# Altium PCB PCB_light_panel.pcbdoc
Units mil, origin at the board's own origin, x right, y up, seen from the top; angles counter-clockwise.
Board outline 3385.82 x 3385.82 mil, 2 copper layers (Top Layer, Bottom Layer); 23 components, 24 nets, 88 pads, 0 vias.
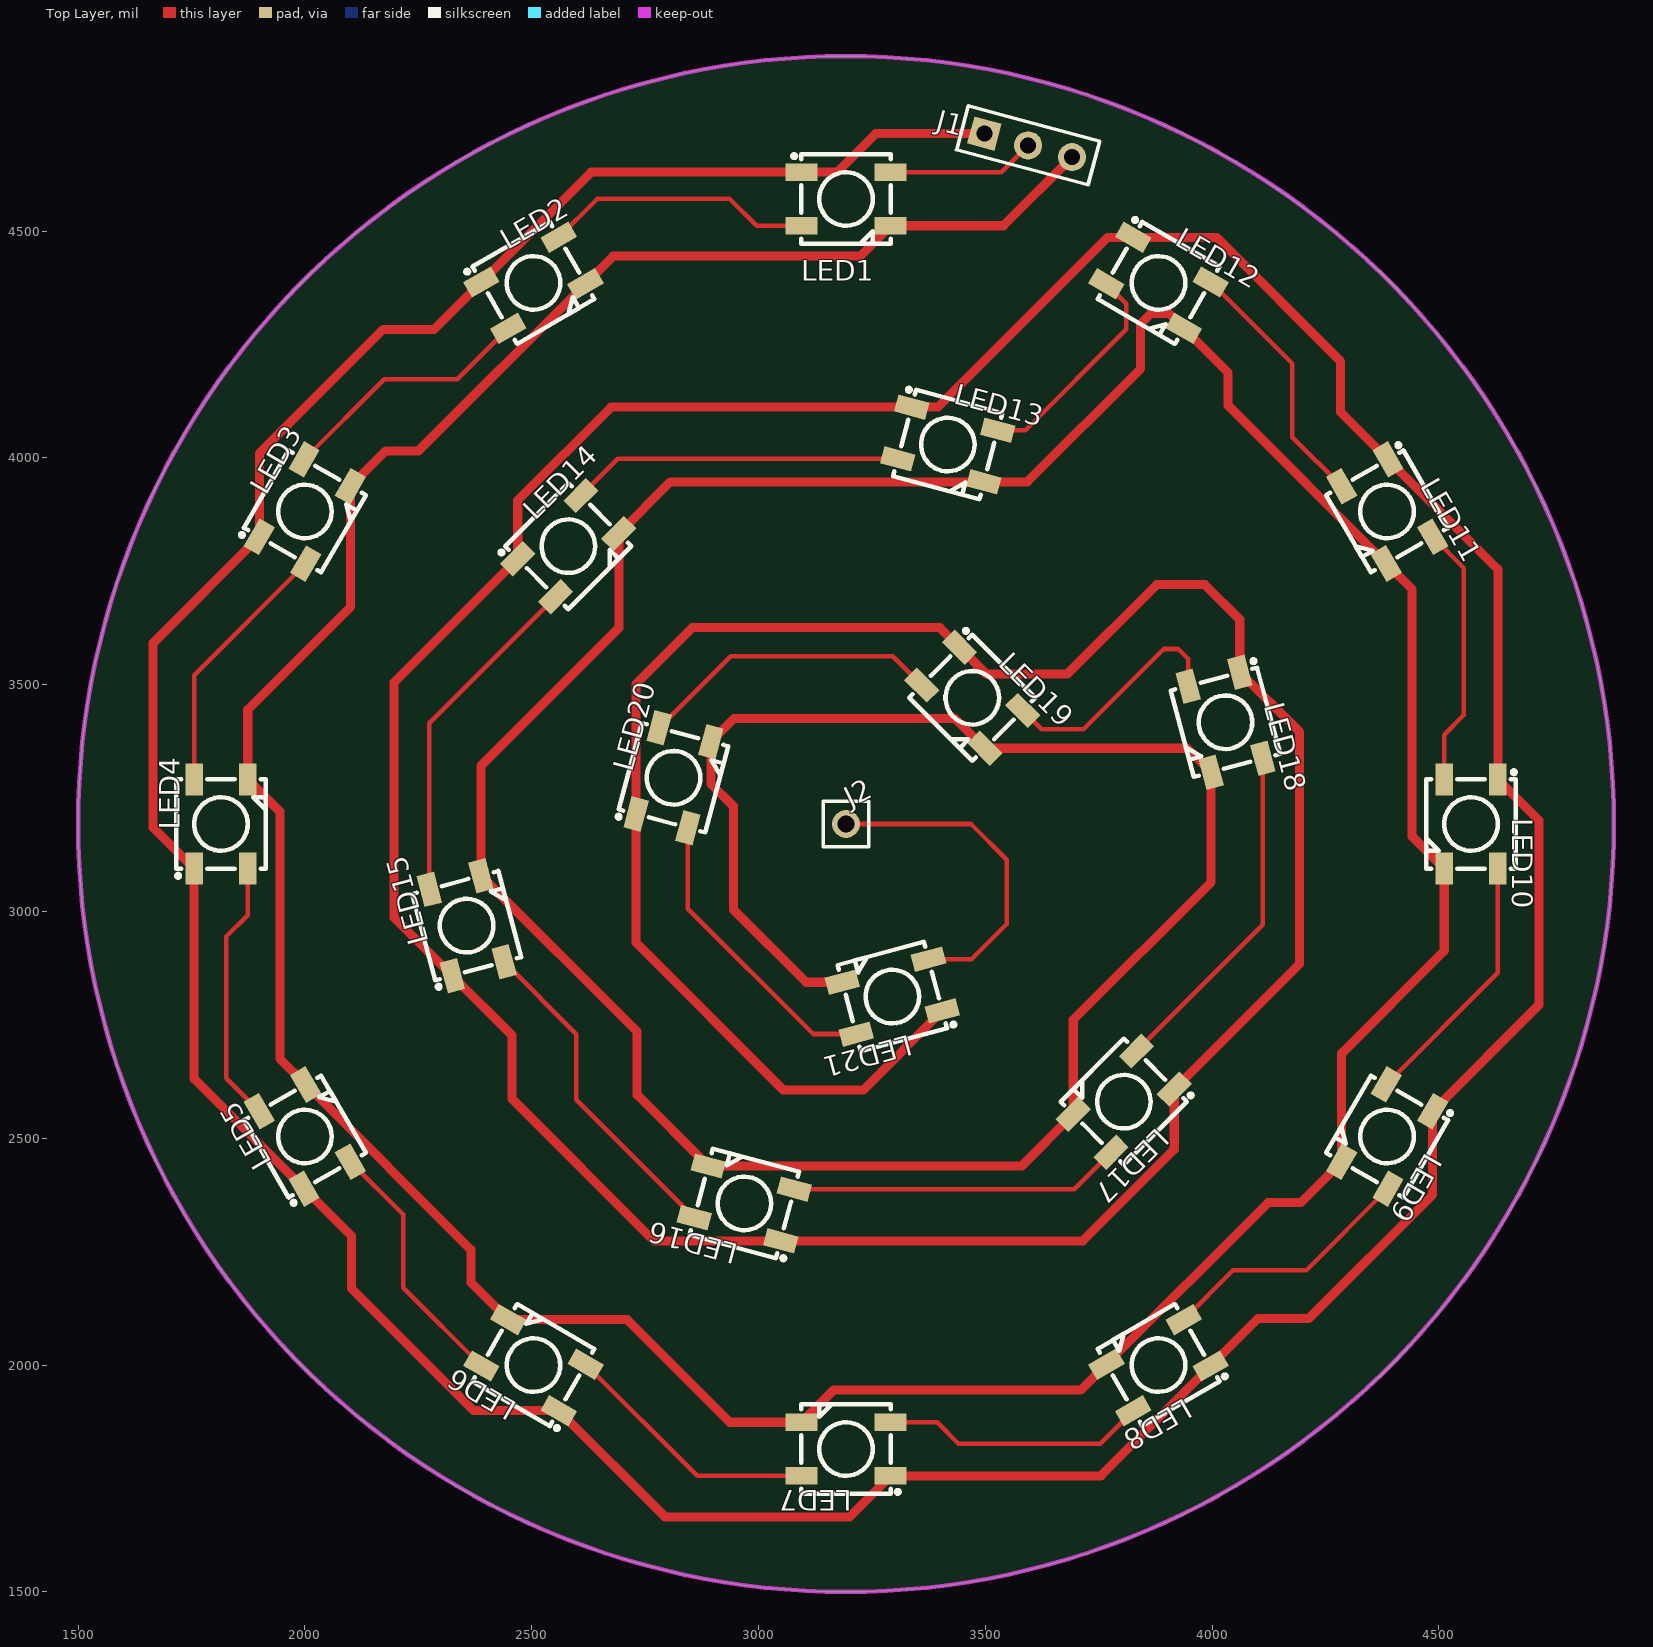
[diagram p0: Top Layer view]
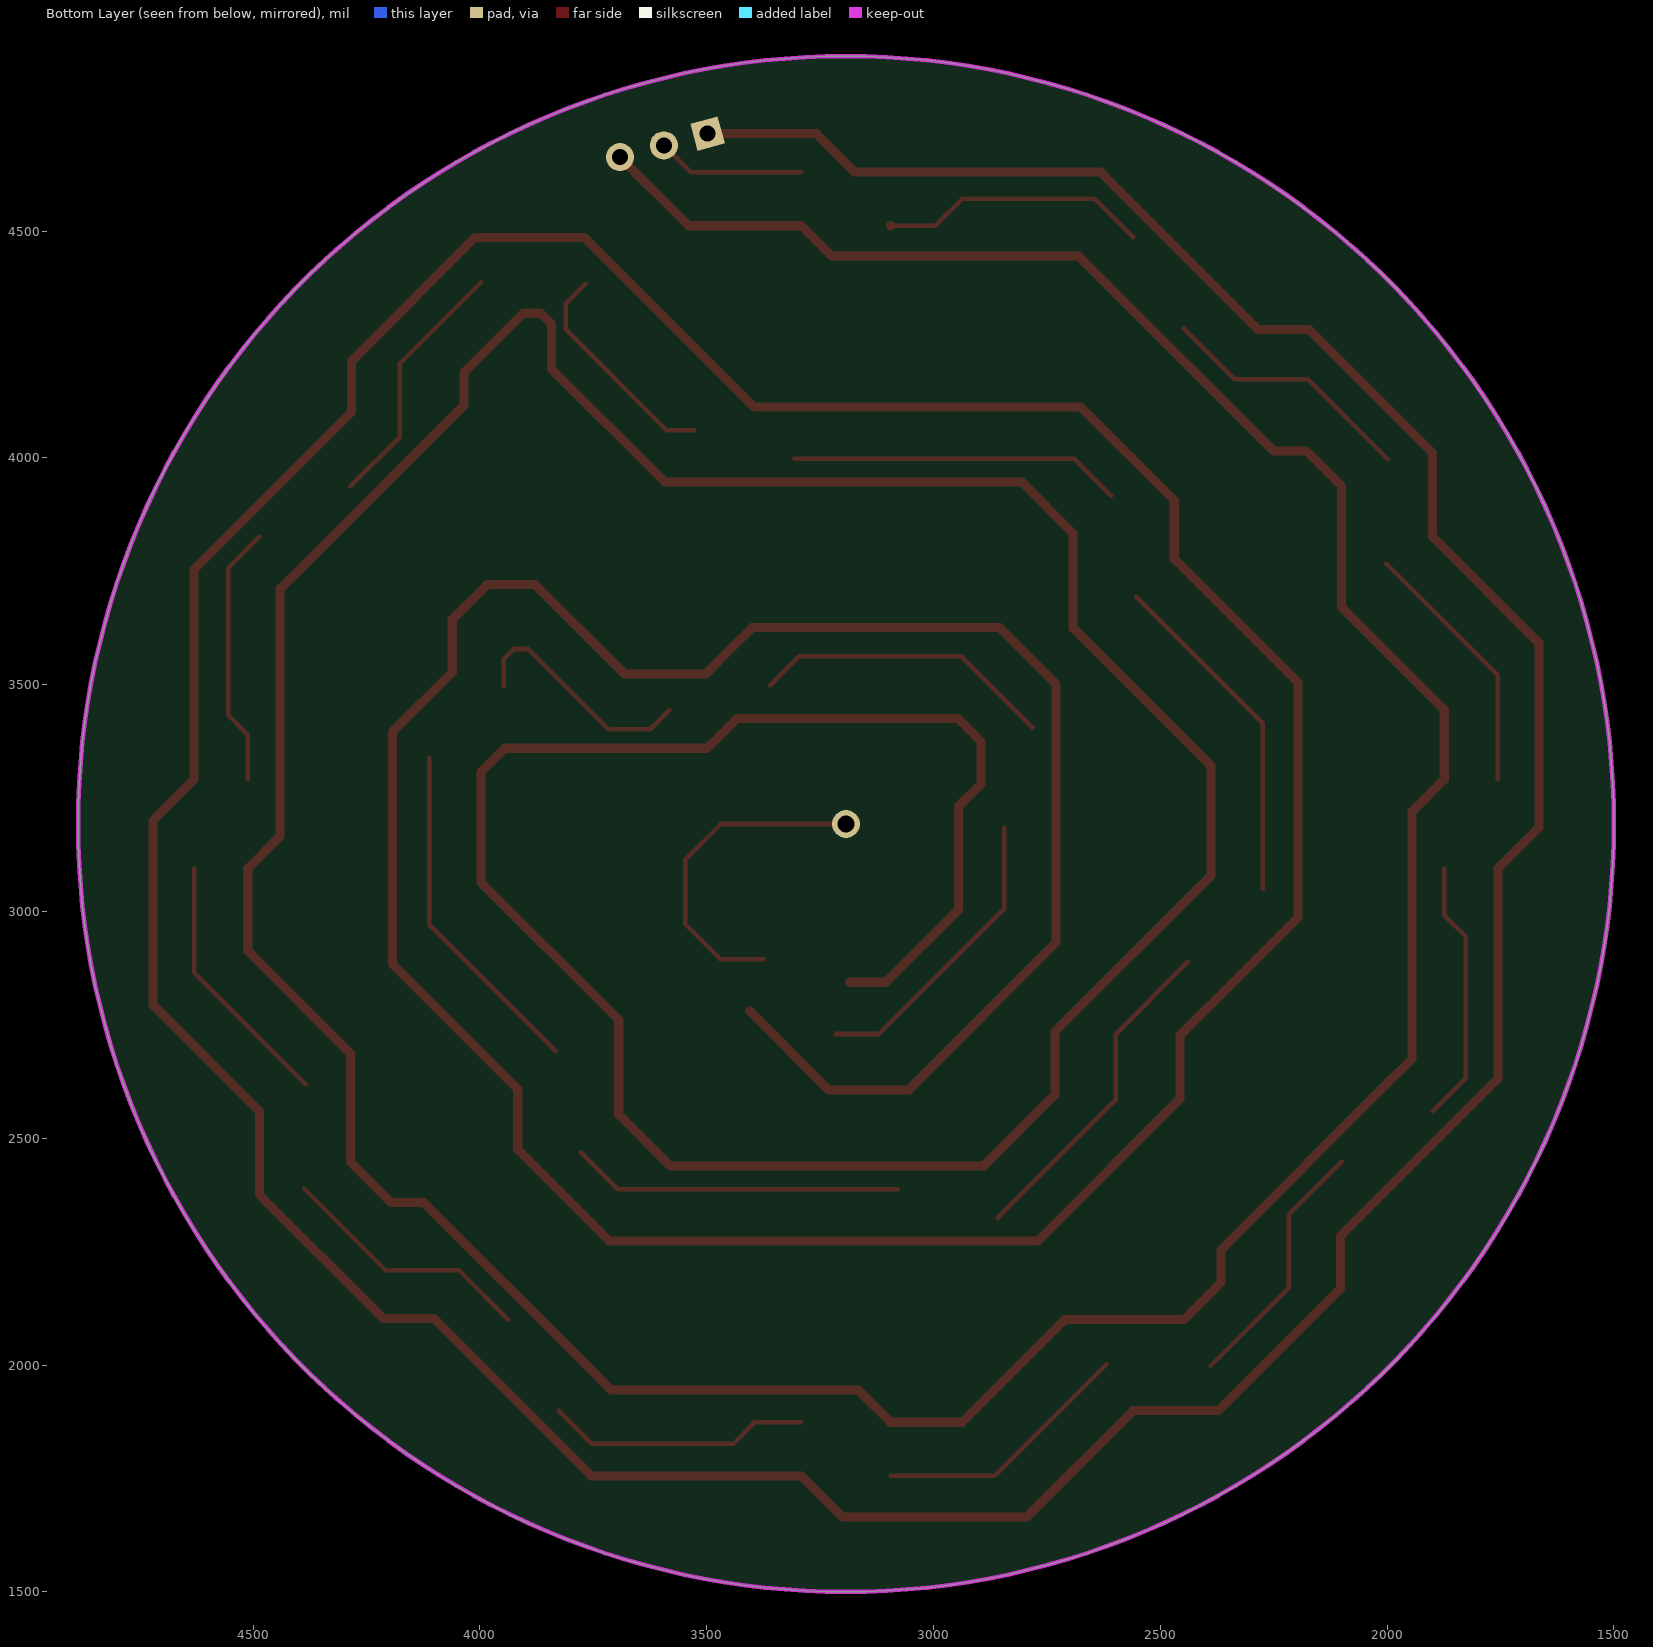
[diagram p1: Bottom Layer view, seen from below]

## Layer stack, top to bottom
Top Solder: solder mask 0.4, Solder Resist, Dk 3.5
Top Layer: signal copper 1.4
Dielectric1: dielectric 12.6, FR-4, Dk 4.8
Bottom Layer: signal copper 1.4
Bottom Solder: solder mask 0.4, Solder Resist, Dk 3.5

## Board outline
3192.91,1500 cw(c3192.91,3192.91) 1500,3192.91 cw(c3192.91,3192.91) 3192.91,4885.82 cw(c3192.91,3192.91) 4885.82,3192.91 cw(c3192.91,3192.91)

## Design rules (kind name [scope] priority, off if disabled: settings)
Clearance [All] p1: gap=10 ignorepadtopadclearanceinfootprint=FALSE except(0: Arc-Hole Track-Hole SMDPad-Hole THPad-Hole Via-Hole Fill-Hole Poly-Hole Region-Hole Text-Hole)
PolygonConnect [All] p1: connectstyle=Relief reliefconductorwidth=10 reliefentries=4 polygonreliefangle="90 Angle" airgapwidth=10
RoutingVias [All] p1: holewidth=28 width=50 viastyle="Through Hole" minholewidth=28 minwidth=50 maxholewidth=28 maxwidth=50
SolderMaskExpansion [All] p1: expansion=4 istentingtop=FALSE
Width [All] p1: maxlimit=10 minlimit=10 preferedwidth=10
30 further rules are at their usual default settings.

## Components (designator, comment, footprint, x,y, rotation, side; value= is the part's Value field where it differs from the comment)
J1 "HDR-M-2.54_1x3" HDR-M-2.54_1X3 3594.48,4688.97 r345 top
J2 "HDR-M-2.54_1x1" HDR-M-2.54_1X1 3192.91,3192.91 r0 top
LED1 "WS2812B" LED-SMD_4P-L5.0-W5.0-TL 3192.91,4570.86 r0 top
LED2 "WS2812B" LED-SMD_4P-L5.0-W5.0-TL 2503.93,4385.82 r30 top
LED3 "WS2812B" LED-SMD_4P-L5.0-W5.0-TL 2000,3881.89 r60 top
LED4 "WS2812B" LED-SMD_4P-L5.0-W5.0-TL 1814.96,3192.91 r90 top
LED5 "WS2812B" LED-SMD_4P-L5.0-W5.0-TL 2000,2503.93 r120 top
LED6 "WS2812B" LED-SMD_4P-L5.0-W5.0-TL 2503.93,2000 r150 top
LED7 "WS2812B" LED-SMD_4P-L5.0-W5.0-TL 3192.91,1814.96 r180 top
LED8 "WS2812B" LED-SMD_4P-L5.0-W5.0-TL 3881.89,2000 r210 top
LED9 "WS2812B" LED-SMD_4P-L5.0-W5.0-TL 4385.82,2503.93 r240 top
LED10 "WS2812B" LED-SMD_4P-L5.0-W5.0-TL 4570.86,3192.91 r270 top
LED11 "WS2812B" LED-SMD_4P-L5.0-W5.0-TL 4385.82,3881.89 r300 top
LED12 "WS2812B" LED-SMD_4P-L5.0-W5.0-TL 3881.89,4385.82 r330 top
LED13 "WS2812B" LED-SMD_4P-L5.0-W5.0-TL 3417.2,4029.48 r345 top
LED14 "WS2812B" LED-SMD_4P-L5.0-W5.0-TL 2580.6,3805.4 r45 top
LED15 "WS2812B" LED-SMD_4P-L5.0-W5.0-TL 2356.6,2968.8 r105 top
LED16 "WS2812B" LED-SMD_4P-L5.0-W5.0-TL 2968.8,2356.4 r165 top
LED17 "WS2812B" LED-SMD_4P-L5.0-W5.0-TL 3805.29,2580.74 r225 top
LED18 "WS2812B" LED-SMD_4P-L5.0-W5.0-TL 4029.48,3417.2 r285 top
LED19 "WS2812B" LED-SMD_4P-L5.0-W5.0-TL 3471.2,3471.2 r315 top
LED20 "WS2812B" LED-SMD_4P-L5.0-W5.0-TL 2812.6,3294.8 r75 top
LED21 "WS2812B" LED-SMD_4P-L5.0-W5.0-TL 3295,2812.4 r195 top

## Footprints (in the part's own frame and the unit in brackets; to place one, negate y for a bottom-side part, rotate by r counter-clockwise, add the part's x,y. Pads: shape width x height; smd on the part's side, far side on the other; paste and mask are expansions set on the pad)
HDR-M-2.54_1X1 [mil]
  round 62 hole 37.2: 1(0,0)
  silkscreen extent -50,-50 50,50
HDR-M-2.54_1X3 [mil]
  rect 62x62 hole 35: 1(-100,0)
  round 62 hole 35: 2(0,0) 3(100,0)
  silkscreen extent -150,-50 150,50
LED-SMD_4P-L5.0-W5.0-TL [mm]
  rect 1.8x1 smd: 1(-2.5,1.5) 2(-2.5,-1.5) 3(2.5,-1.5) 4(2.5,1.5)
  silkscreen extent -3,-2.5 2.5,2.5

## Nets (pads, with @x,y where several pads share a name; then routed paths per layer and width w, separated by ;. In a path a pad name is that pad's centre, name@x,y a point inside that pad or via, vN(x,y) a via of type N, cw(c..) or ccw(c..) an arc to the next point about the centre after c; other vN are vias at no path point)
DIN: J1.2 LED1.4 | length 327.6
  Top Layer w10: LED1.4 3535.42,4629.91 J1.2
DOUT: J2.1 LED21.2 | length 733.2
  Top Layer w10: J2.1 3468.5,3192.9 3547.2,3114.2 3547.2,2972.4 3469.7,2894.9 LED21.2
GND: J1.3 LED1.3 LED2.3 LED3.3 LED4.3 LED5.3 LED6.3 LED7.3 LED8.3 LED9.3 LED10.3 LED11.3 LED12.3 LED13.3 LED14.3 LED15.3 LED16.3 LED17.3 LED18.3 LED19.3 LED20.3 LED21.3 | length 15245.8
  Top Layer w20: LED21.3 3104.8,2844 2944.9,3003.9 2944.9,3232.3 2895.1,3282.1 LED20.3 2945.7,3425.2 3433.6,3425.2 LED19.3@3499,3359.8 ; LED19.3@3499.04,3359.85 3944.92,3359.85 LED18.3@3997.92,3306.85 ; J1.3 3539.8,4511.8 LED1.3 3224.4,4444.9 2679.7,4444.9 LED2.3 2250.5,4015.7 2178.4,4015.7 LED3.3 2100.3,3671.2 1874,3444.9 LED4.3 1944.9,3220.5 1944.9,2675.7 LED5.3 2366.1,2254.5 2366.1,2182.4 LED6.3 2710.7,2100.3 2937,1874 LED7.3 3165.4,1944.9 3710.1,1944.9 LED8.3 4123.5,2358.3 4195.5,2358.3 LED9.3 4285.5,2687 4511.8,2913.4 LED10.3 4440.9,3165.4 4440.9,3710.1 LED11.3 4035.4,4115.6 4035.4,4187.7 LED12.3 3904.2,4318.9 3866.1,4318.9 3842.5,4295.3 3842.5,4196.8 3592.6,3947 LED13.3 2805.7,3947 2692,3833.2 2692,3625 2388.2,3321.2 LED15.3 2732.3,2735.1 2732.3,2595.6 LED16.3 3579.9,2438.9 LED17.3 3693.9,2760.9 3997.9,3064.8 LED18.3@3997.9,3306.8
LED1_2: LED1.2 LED2.4 | length 594.5
  Top Layer w10: LED2.4 2644.3,4570.9 2937,4570.9 2996.1,4511.8 LED1.2
LED2_2: LED2.2 LED3.4 | length 569.8
  Top Layer w10: LED3.4 2174.6,4173.2 2336,4173.2 LED2.2
LED3_2: LED3.2 LED4.4 | length 577.7
  Top Layer w10: LED4.4 1755.9,3521.1 LED3.2
LED4_2: LED4.2 LED5.4 | length 584.6
  Top Layer w10: LED4.2 1874,2992.1 1826.8,2944.9 1826.8,2632.4 LED5.4
LED5_2: LED5.2 LED6.4 | length 569.8
  Top Layer w10: LED5.2@2100.3,2448.2 2216.5,2332 2216.5,2170.7 LED6.4
LED6_2: LED6.2 LED7.4 | length 577.7
  Top Layer w10: LED6.2 2864.71,1755.91 LED7.4
LED7_2: LED7.2 LED8.4 | length 584.6
  Top Layer w10: LED7.2 3393.7,1874 3440.9,1826.8 3753.4,1826.8 LED8.4
LED8_2: LED8.2 LED9.4 | length 569.8
  Top Layer w10: LED8.2@3937.6,2100.3 4045.9,2208.7 4207.2,2208.7 LED9.4@4387.7,2389.2
LED9_2: LED9.2 LED10.4 | length 577.7
  Top Layer w10: LED9.2 4629.91,2864.71 LED10.4
LED10_2: LED10.2 LED11.4 | length 581.3
  Top Layer w10: LED11.4 4555.1,3757.2 4555.1,3433.1 4511.8,3389.8 LED10.2
LED11_2: LED11.2 LED12.4 | length 569.8
  Top Layer w10: LED12.4@3996.7,4387.7 4177.2,4207.2 4177.1,4045.9 LED11.2
LED12_2: LED12.2 LED13.4 | length 494.2
  Top Layer w10: LED13.4 3588.6,4061 3811,4283.4 3811,4340 LED12.2
LED13_2: LED13.2 LED14.4 | length 732.1
  Top Layer w10: LED14.4 2689.6,3997.9 LED13.2@3306.9,3997.9
LED14_2: LED14.2 LED15.4 | length 760.9
  Top Layer w10: LED15.4 2274.09,3415.38 LED14.2
LED15_2: LED15.2 LED16.4 | length 737.9
  Top Layer w10: LED15.2 2598.4,2729.7 2598.4,2584.9 LED16.4
LED16_2: LED16.2 LED17.4 | length 732
  Top Layer w10: LED16.2 3696,2388 LED17.4
LED17_2: LED17.2 LED18.4 | length 760.8
  Top Layer w10: LED17.2 4111.99,2970.95 LED18.4
LED18_2: LED18.2 LED19.4 | length 524
  Top Layer w10: LED19.4 3624.3,3401.6 3716.5,3401.6 3893.7,3578.7 3925.2,3578.7 3947,3557 LED18.2
LED19_2: LED19.2 LED20.4 | length 670.7
  Top Layer w10: LED20.4 2938.9,3563 3295.9,3563 LED19.2
LED20_2: LED20.2 LED21.4 | length 663.6
  Top Layer w10: LED20.2 2844.2,3006.2 3120.5,2729.9 LED21.4
VCC: J1.1 LED1.1 LED2.1 LED3.1 LED4.1 LED5.1 LED6.1 LED7.1 LED8.1 LED9.1 LED10.1 LED11.1 LED12.1 LED13.1 LED14.1 LED15.1 LED16.1 LED17.1 LED18.1 LED19.1 LED20.1 LED21.1 | length 18719.4
  Top Layer w20: LED2.1 2631.33,4629.91 LED1.1 3173.3,4629.9 3258.1,4714.9 J1.1 ; LED2.1 2284.9,4283.5 2173.2,4283.5 1899.6,4009.9 LED3.1 1665.4,3591.9 1665.4,3185 LED4.1 1755.9,2631.3 LED5.1 2102.4,2284.9 2102.4,2169.3 2372,1899.6 LED6.1 2793.9,1665.4 3200.8,1665.4 LED7.1 3754.5,1755.9 LED8.1 4100.9,2102.4 4212.6,2102.4 4486.2,2375.9 LED9.1 4720.5,2793.9 4720.5,3200.8 LED10.1 ; LED21.1 3230.8,2606.3 3055.1,2606.3 2730.1,2931.3 LED20.1 2730.1,3501.7 2854.3,3626 3399.9,3626 LED19.1 3502.4,3523.6 3681.1,3523.6 3877.9,3720.5 3984.2,3720.5 4061,3643.7 LED18.1 4192.9,3395.7 4192.9,2884.8 LED17.1 3916.6,2475.7 3714.8,2273.9 LED16.1 2769.4,2273.9 2456.7,2586.6 2456.7,2726.7 LED15.1 2196.8,2986.6 2196.8,3505.2 LED14.1 2469.2,3906.2 2675,4112 LED13.1 3395.5,4112 3769.6,4486.2 LED12.1 4009.9,4486.2 4283.5,4212.6 4283.5,4100.9 LED11.1@4387.7,3996.6 ; LED11.1@4387.75,3996.65 4629.91,3754.49 LED10.1

## Keep-outs
Keep-Out Layer:
  circle w10: c3192.91,3192.91 r1692.91